# EAGLE board li-ion (EAGLE 7.2.0)
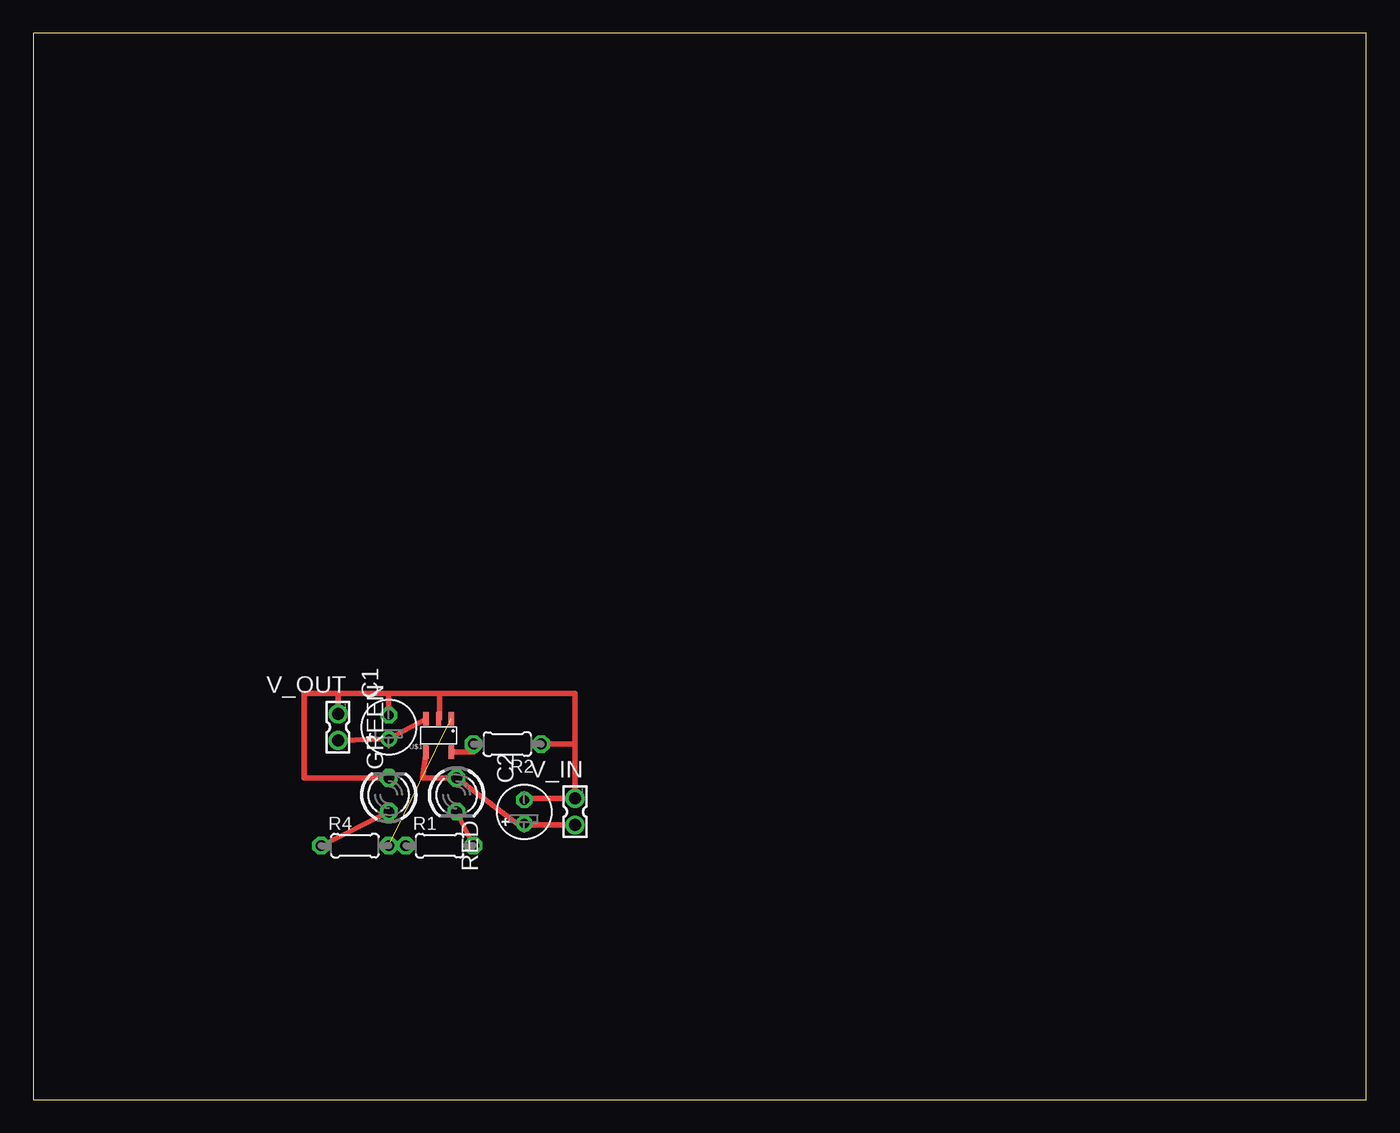
[diagram p0: board, top side]

Size 100 x 80 mm. Coordinates in mm from the lower left corner, seen from the top.
Outline: 0,0 100,0 100,80 0,80 0,0
Copper layers (1*16): Top 0.035mm / dielectric 1.5mm / Bottom 0.035mm
Design rules "default": minimum track width 10mil, minimum drill 24mil, track to track 8mil, track to pad 8mil, pad to pad 8mil, via to via 8mil, smd to smd 8mil, copper to edge 40mil, drill to drill 8mil, minimum pad ring 10mil, minimum via ring 8mil, stop-mask expansion 4mil, vias tented up to drill 0mil, thermal gap 10mil

## Footprints (pad centres in the part's own frame; a part is rotated, then mirrored left to right if it is on the bottom)
E1,8-4 = drill 0.711 pad 1.168: + -0.889,0 | drill 0.711 pad 1.168 octagon: - 0.889,0
LED3MM = drill 0.813 octagon: A -1.27,0; K 1.27,0
0204/5 = drill 0.813 octagon: 1 -2.54,0; 2 2.54,0
5PIN_SOT23 = smd 0.4 x 1: P$1 0.4,-0.63; P$2 1.35,-0.63; P$3 2.3,-0.63; P$4 2.3,1.87; P$5 0.4,1.87
332-02 = drill 0.9 pad 1.27: 1 0,-1; 2 0,1

## Placement (x,y rotation side)
C1  10u  [E1,8-4]  26.67,27.94 90 top
C2  10u  [E1,8-4]  36.83,21.59 90 top
GREEN  [LED3MM]  26.67,22.86 90 top
R1  1k  [0204/5]  30.48,19.05 0 top
R2  2k  [0204/5]  35.56,26.67 180 top
R4  1k  [0204/5]  24.13,19.05 0 top
RED  [LED3MM]  31.75,22.86 270 top
U$1  [5PIN_SOT23]  31.75,27.94 180 top
V_IN  332-02  [332-02]  40.64,21.59 180 top
V_OUT  332-02  [332-02]  22.86,27.94 180 top

## Library data of the parts
C1 C2 R1 R2 R4 = rcl
GREEN RED = led
U$1 = mcp73831
V_IN V_OUT = con-garry

## Nets
GND: C1.- C2.- GREEN.K R2.1 U$1.P$2 V_IN.1 V_OUT.1
N$1: C1.+ U$1.P$3 V_OUT.2
N$2: R2.2 U$1.P$5
N$3: R1.1 R4.2 U$1.P$1
N$4: R1.2 RED.K
N$6: GREEN.A R4.1
VCC: C2.+ RED.A U$1.P$4 V_IN.2

## Tracks (layer width: path | path; a pad name or v marks a point on that pad's centre or on a via)
GND
  Top 0.406: U$1.P$2 30.48,28.57 30.48,30.48 | 30.48,30.48 26.67,30.48 | 26.67,30.48 22.86,30.48 | 22.86,30.48 20.32,30.48 20.32,24.13 GREEN.K | 30.48,30.48 40.64,30.48 40.64,26.67 | 40.64,26.67 V_IN.1 36.83,22.59 C2.- | R2.1 40.64,26.67 | C1.- 26.67,30.48 | V_OUT.1 22.86,30.48
N$1
  Top 0.406: U$1.P$3 C1.+ V_OUT.2
N$2
  Top 0.406: U$1.P$5 33.02,26.07 R2.2
N$3  (1 unrouted)
  Top 0.406: R4.2 R1.1
N$4
  Top 0.406: R1.2 RED.K
N$6
  Top 0.406: R4.1 GREEN.A
VCC
  Top 0.406: V_IN.2 36.83,20.59 C2.+ 36.83,20.32 RED.A 29.21,24.13 U$1.P$4